# Altium PCB Capstone.PcbDoc
Units mil, origin at the board's own origin, x right, y up, seen from the top; angles counter-clockwise.
Board outline 6000 x 4000 mil, 2 copper layers (Top Layer, Bottom Layer), stack 61.756 mil thick; 44 components, 44 nets, 202 pads, 31 vias.
Unrouted connection lines stored in the file: 29.
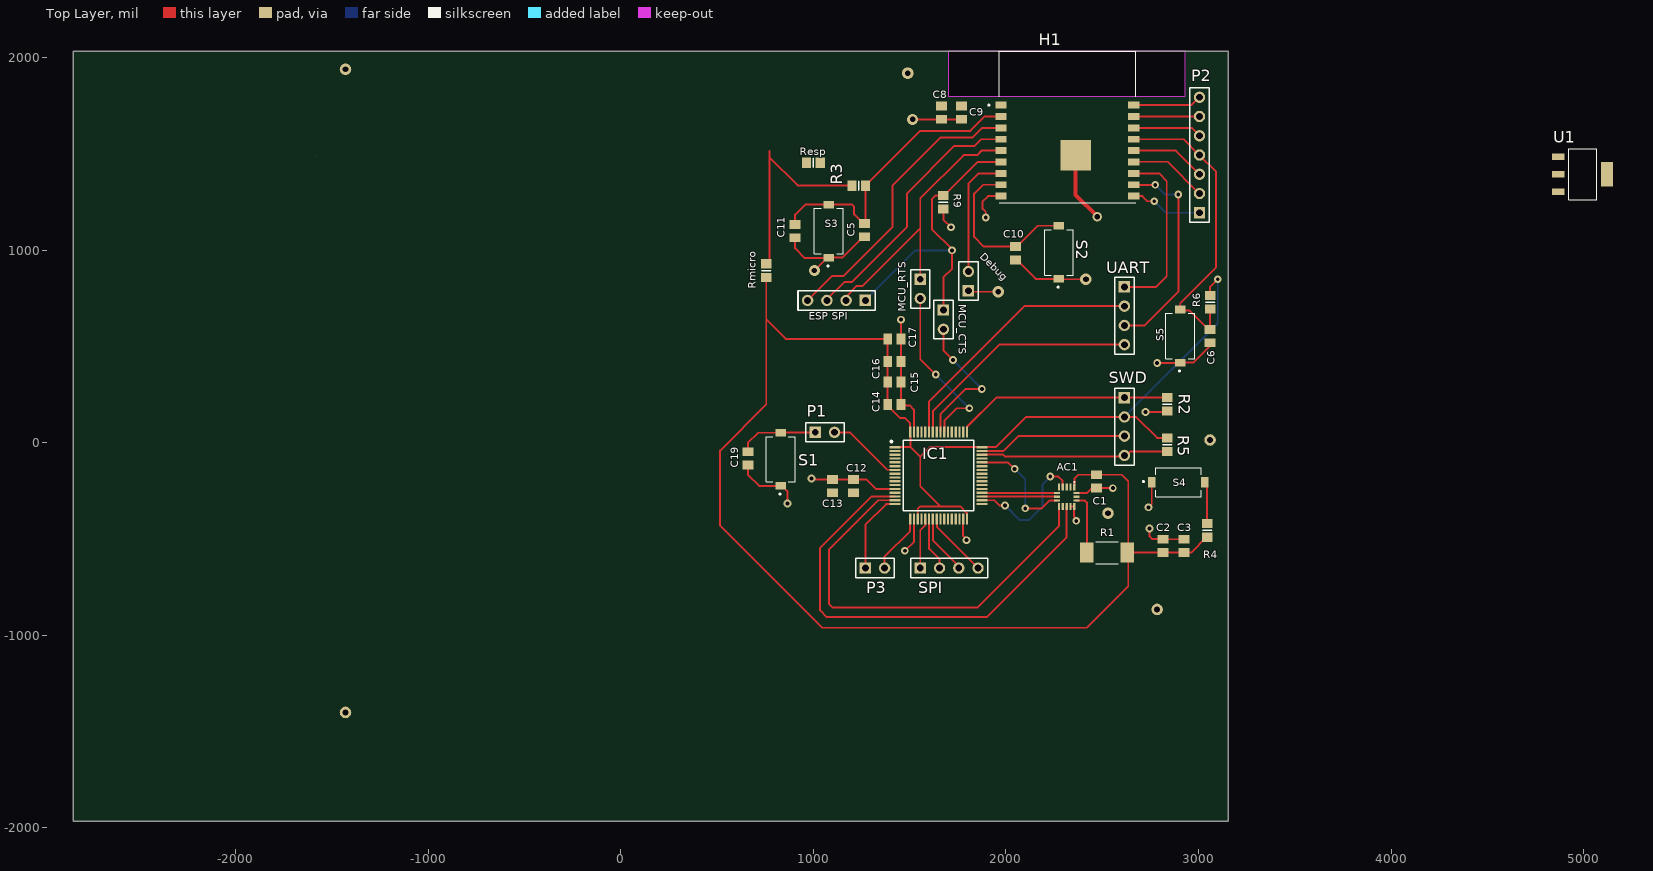
[diagram p0: Top Layer view]
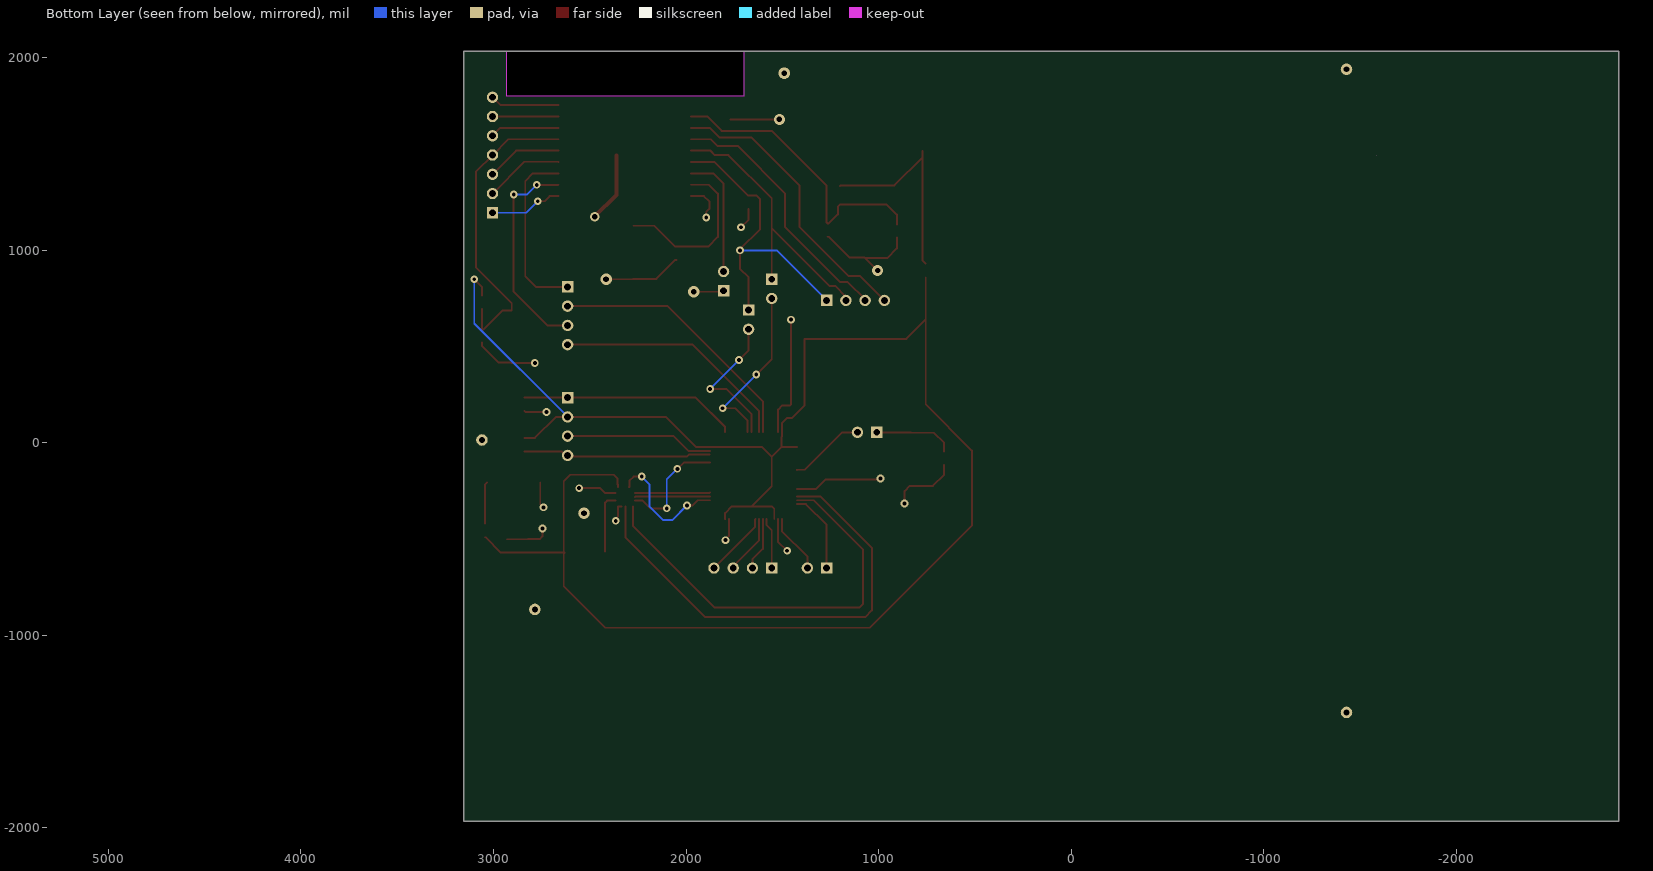
[diagram p1: Bottom Layer view, seen from below]

## Layer stack, top to bottom
Top Solder: solder mask 1, SM-001, Dk 4
Top Layer: signal copper 1.3779
Dielectric 1: core 59, Core-043, Dk 4.3
Bottom Layer: signal copper 1.3779
Bottom Solder: solder mask 1, SM-001, Dk 4

## Board outline
-2845,-1965 3155,-1965 3155,2035 -2845,2035
cut-out: -1585,1490
cut-out: 1700,2035 1700,1800 2930,1800 2930,2035

## Design rules (kind name [scope] priority, off if disabled: settings)
Clearance [All] p1: gap=10 ignorepadtopadclearanceinfootprint=FALSE except(0: Arc-Hole Track-Hole SMDPad-Hole THPad-Hole Via-Hole Fill-Hole Poly-Hole Region-Hole Text-Hole; 6: Arc-Arc Arc-Track Arc-SMDPad Track-Track Track-SMDPad SMDPad-SMDPad)
DiffPairsRouting [All] p1: maxlimit=10 minlimit=6 mostfreqgap=10 toplayer_minwidth=15 toplayer_maxwidth=15 toplayer_prefwidth=15 bottomlayer_minwidth=15 bottomlayer_maxwidth=15 bottomlayer_prefwidth=15 maxuncoupledlength=500
PolygonConnect [All] p1: connectstyle=Direct reliefconductorwidth=10 reliefentries=4 polygonreliefangle="90 Angle" airgapwidth=10
RoomDefinition Capstone [InComponentClass('Capstone')] p1: confinementstyle=ConfineOut formatcopy=TRUE lockcomponents=FALSE outline 3200,-1905 3560,-1905 3560,-1425 3200,-1425
RoutingVias [All] p1: holewidth=28 width=50 viastyle="Through Hole" minholewidth=28 minwidth=50 maxholewidth=28 maxwidth=50
SolderMaskExpansion [All] p1: expansion=4
Width [All] p1: maxlimit=20 minlimit=10 preferedwidth=10 minimp=50.000000 maximp=50.000000 favimp=50.000000
29 further rules are at their usual default settings.

## Components (designator, comment, footprint, x,y, rotation, side; value= is the part's Value field where it differs from the comment)
AC1 "ADXL362BCCZ-RL7" CC-16-4 2315,-280 r270 top
C1 "Cap" *CAPC2012X88N 2470,-200 r270 top value=1uF
C2 "Cap" *CAPC2012X88N 2815,-535 r270 top value=0.1uF
C3 "Cap" *CAPC2012X88N 2925,-535 r90 top value=1uF
C5 "Cap" *CAPC2012X88N 1265,1105 r270 top value=0.1uF
C6 "Cap" *CAPC2012X88N 3060,555 r270 top value=0.1uF
C8 "Cap" *CAPC2012X88N 1665,1715 r270 top value=10uF
C9 "Cap" *CAPC2012X88N 1770,1715 r270 top value=0.1uF
C10 "Cap" *CAPC2012X88N 2050,985 r90 top value=0.1uF
C11 "Cap" *CAPC2012X88N 905,1100 r90 top value=0.1uF
C12 "Cap" *CAPC2012X88N 1209,-224.45 r270 top value=10nF
C13 "Cap" *CAPC2012X88N 1099,-224.45 r270 top value=1uF
C14 "Cap" *CAPC2012X88N 1420,200 r180 top value=4.7uF
C15 "Cap" *CAPC2012X88N 1420,316.67 r180 top value=100nF
C16 "Cap" *CAPC2012X88N 1420,423.33 r180 top value=100nF
C17 "Cap" *CAPC2012X88N 1420,540 r180 top value=100nF
C19 "Cap" *CAPC2012X88N 660,-80 r90 top value=0.1uF
Debug "Header 2" HDR1X2 1805,790 r90 top
"ESP SPI" "Header 4" HDR1X4 1270,740 r180 top
H1 "ESP-WROOM-02D" ESPWROOM02D 2290,1640 r0 top
IC1 "STM32L433RCT6" QFP50P1200X1200X160-64N 1650,-170 r0 top
MCU_CTS "Header 2" HDR1X2 1675,690 r270 top (schematic designator P4)
MCU_RTS "Header 2" HDR1X2 1555,850 r270 top (schematic designator P5)
P1 "Reset" HDR1X2 1010,55 r0 top
P2 "Comment" HDR1X7 3005,1195 r90 top
P3 "Debug" HDR1X2 1270,-650 r0 top
R1 "Res1" RES_WSC_2515 2525,-570 r0 top value=50
R2 "Res1" 6-0805_N 2838.05,200 r270 top value=1K
R3 "Res1" 6-0805_N 1235,1335 r0 top value=10K
R4 "Res1" 6-0805_N 3045,-454.57 r270 top value=10K
R5 "Res1" 6-0805_N 2838.06,-10 r90 top value=1K
R6 "Res1" 6-0805_N 3060,730 r270 top value=10K
R9 "Res1" 6-0805_N 1675,1250 r90 top value=10K
Resp "Comment" 6-0805_N 1000,1455 r180 top value=0
Rmicro "Comment" 6-0805_N 755,895 r270 top value=0
S1 "KSR222GLFS" *SW_KSR223GLFG 830,-85 r90 top
S2 "KSR222GLFS" *SW_KSR223GLFG 2275,990 r90 top
S3 "KSR222GLFS" *SW_KSR223GLFG 1080,1100 r90 top
S4 "KSR222GLFS" *SW_KSR223GLFG 2895,-205 r0 top
S5 "KSR222GLFS" *SW_KSR223GLFG 2905,555 r90 top
SPI "" HDR1X4 1555,-650 r0 top
SWD "Comment" HDR1X4 2615,235 r270 top
U1 "LM1117IMPX-3.3" *SOT230P700X180-4N 4995,1395 r0 top
UART "Comment" HDR1X4 2615,810 r270 top

## Footprints (in the part's own frame and the unit in brackets; to place one, negate y for a bottom-side part, rotate by r counter-clockwise, add the part's x,y. Pads: shape width x height; smd on the part's side, far side on the other; paste and mask are expansions set on the pad)
6-0805_N [mm] "Chip Resistor, Body 2.0x1.2mm, IPC Medium Density"
  rect 1.2x1.4 smd: 1(-0.9,0) 2(0.9,0)
  silkscreen extent 0,-0.6 0,0.6, body extent -1.07,-0.7 1.07,0.7, height 0.7
*CAPC2012X88N [mm]
  rect 1.16x1.47 smd: 1(-0.875,0) 2(0.875,0)
*SOT230P700X180-4N [mil]
  rect 64x35 smd: 1(-126,91) 2(-126,0) 3(-126,-91)
  rect 64x125 smd: 4(126,0)
  silkscreen extent -73,-132 73,132
*SW_KSR223GLFG [mm]
  rect 1x1.4 smd: 1(-3.5,0) 2(3.5,0)
  silkscreen extent -4.7,-1.9 3,1.9
CC-16-4 [mm]
  rect 0.925x0.3 smd: 1(-1.288,1) 2(-1.288,0.5) 3(-1.288,0) 4(-1.288,-0.5) 5(-1.288,-1) 9(1.287,-1) 10(1.287,-0.5) 11(1.287,0) 12(1.287,0.5) 13(1.287,1)
  rect 0.3x0.8 smd: 6(-0.5,-1.275) 7(0,-1.275) 8(0.5,-1.275) 14(0.5,1.275) 15(0,1.275) 16(-0.5,1.275)
  silkscreen extent -1.98,1 -1.93,1.04
ESPWROOM02D [mm]
  rect 1.5x0.9 smd: 1(-8.025,2.9) 2(-8.025,1.4) 3(-8.025,-0.1) 4(-8.025,-1.6) 5(-8.025,-3.1) 6(-8.025,-4.6) 7(-8.025,-6.1) 8(-8.025,-7.6) 9(-8.025,-9.1) 10(9.475,-9.1) 11(9.475,-7.6) 12(9.475,-6.1) 13(9.475,-4.6) 14(9.475,-3.1) 15(9.475,-1.6) 16(9.475,-0.1) 17(9.475,1.4) 18(9.475,2.9)
  rect 4x4 smd: 19(1.825,-3.71)
  silkscreen extent -9.72,-10 9.72,10
HDR1X2 [mm] "Connector; Header; 2 Position"
  rect 1.5x1.5 hole 0.9: 1(0,0)
  round 1.5 hole 0.9: 2(2.54,0)
  silkscreen extent -1.27,-1.27 3.81,1.27
HDR1X4 [mm] "Connector; Header; 4 Position"
  rect 1.5x1.5 hole 0.9: 1(0,0)
  round 1.5 hole 0.9: 2(2.54,0) 3(5.08,0) 4(7.62,0)
  silkscreen extent -1.27,-1.27 8.89,1.27
HDR1X7 [mm] "Connector; Header; 7 Position"
  rect 1.5x1.5 hole 0.9: 1(0,0)
  round 1.5 hole 0.9: 2(2.54,0) 3(5.08,0) 4(7.62,0) 5(10.16,0) 6(12.7,0) 7(15.24,0)
  silkscreen extent -1.27,-1.27 16.51,1.27
QFP50P1200X1200X160-64N [mm]
  rect 1.475x0.3 smd: 1(-5.738,3.75) 2(-5.738,3.25) 3(-5.738,2.75) 4(-5.738,2.25) 5(-5.738,1.75) 6(-5.738,1.25) 7(-5.738,0.75) 8(-5.738,0.25) 9(-5.738,-0.25) 10(-5.738,-0.75) 11(-5.738,-1.25) 12(-5.738,-1.75) 13(-5.738,-2.25) 14(-5.738,-2.75) 15(-5.738,-3.25) 16(-5.738,-3.75) 33(5.738,-3.75) 34(5.738,-3.25) 35(5.738,-2.75) 36(5.738,-2.25) 37(5.738,-1.75) 38(5.738,-1.25) 39(5.738,-0.75) 40(5.738,-0.25) 41(5.738,0.25) 42(5.738,0.75) 43(5.738,1.25) 44(5.738,1.75) 45(5.738,2.25) 46(5.738,2.75) 47(5.738,3.25) 48(5.738,3.75)
  rect 0.3x1.475 smd: 17(-3.75,-5.738) 18(-3.25,-5.738) 19(-2.75,-5.738) 20(-2.25,-5.738) 21(-1.75,-5.738) 22(-1.25,-5.738) 23(-0.75,-5.738) 24(-0.25,-5.738) 25(0.25,-5.738) 26(0.75,-5.738) 27(1.25,-5.738) 28(1.75,-5.738) 29(2.25,-5.738) 30(2.75,-5.738) 31(3.25,-5.738) 32(3.75,-5.738) 49(3.75,5.738) 50(3.25,5.738) 51(2.75,5.738) 52(2.25,5.738) 53(1.75,5.738) 54(1.25,5.738) 55(0.75,5.738) 56(0.25,5.738) 57(-0.25,5.738) 58(-0.75,5.738) 59(-1.25,5.738) 60(-1.75,5.738) 61(-2.25,5.738) 62(-2.75,5.738) 63(-3.25,5.738) 64(-3.75,5.738)
  silkscreen extent -6.35,-4.65 4.65,4.65, body extent -6,-6 6,6, height 1.6
RES_WSC_2515 [mil]
  rect 69x103 smd paste+0 mask+0: 1(-105.5,0) 2(105.5,0)
  silkscreen extent -59,-56 59,56, body extent 0,0 10,10, height 10

## Part data
AC1: "Accelerometer", Manufacturer_Name="Analog Devices", Mouser Part Number=584-ADXL362BCCZ-R7, Datasheet Link=http://www.analog.com/media/en/technical-documentation/data-sheets/ADXL362.pdf, Manufacturer_Part_Number=ADXL362BCCZ-RL7, Mouser Price/Stock=https://www.mouser.com/Search/Refine.aspx?Keyword=584-ADXL362BCCZ-R7
C1 C2 C3 C5 C6 C8 C9 C10 C11 C12 C13 C14 C15 C16 C17 C19: "Capacitor", LatestRevisionDate=17-Jul-2002, LatestRevisionNote="Re-released for DXP Platform.", PackageDescription="Radial Cap, Thru-Hole; 2 Leads; 0.3 in Pin Spacing", PackageReference=RAD-0.3, Published=8-Jun-2000, Publisher="Altium Limited"
Debug MCU_CTS MCU_RTS: "Header, 2-Pin", LatestRevisionDate=17-Jul-2002, LatestRevisionNote="Re-released for DXP Platform.", Publisher="Altium Limited"
"ESP SPI": "Header, 4-Pin", LatestRevisionDate=17-Jul-2002, LatestRevisionNote="Re-released for DXP Platform.", Publisher="Altium Limited"
H1: "Hardware", Manufacturer_Name=Espressif, Mouser Part Number=356-ESPWROOM-02D, Datasheet Link=https://br.mouser.com/datasheet/2/891/esp-wroom-02d_esp-wroom-02u_datasheet_en-1365835.pdf, Height=3.2mm, Manufacturer_Part_Number=ESP-WROOM-02D
IC1: "Integrated Circuit", Manufacturer_Name=STMicroelectronics, Mouser Part Number=511-STM32L433RCT6, Datasheet Link=https://www.st.com/resource/en/datasheet/stm32l433rc.pdf, Height=1.6mm, Manufacturer_Part_Number=STM32L433RCT6, Mouser Price/Stock=https://www.mouser.com/Search/Refine.aspx?Keyword=511-STM32L433RCT6
P1 P3: library part "Header 2", "Header, 2-Pin", LatestRevisionDate=17-Jul-2002, LatestRevisionNote="Re-released for DXP Platform.", Publisher="Altium Limited"
P2: library part "Header 7", "Header, 7-Pin", LatestRevisionDate=17-Jul-2002, LatestRevisionNote="Re-released for DXP Platform.", Publisher="Altium Limited"
R1 R2 R3 R4 R5 R6 R9: "Resistor", LatestRevisionDate=17-Jul-2002, LatestRevisionNote="Re-released for DXP Platform.", PackageDescription="Axial Device, Thru-Hole; 2 Leads; 0.3 in Pin Spacing", PackageReference=AXIAL-0.3, Published=8-Jun-2000, Publisher="Altium Limited"
Resp Rmicro: library part Res1, "Resistor", LatestRevisionDate=17-Jul-2002, LatestRevisionNote="Re-released for DXP Platform.", PackageDescription="Axial Device, Thru-Hole; 2 Leads; 0.3 in Pin Spacing", PackageReference=AXIAL-0.3, Published=8-Jun-2000, Publisher="Altium Limited"
S1 S2 S3 S4 S5: library part KSR223GLFG, "Switch Tactile N.O. SPST Round Button Gull Wing 0.01A 32VDC 0.2VA 200000Cycles 2N SMD Automotive T/R", Package=None, Digi-Key_Part_Number=401-1704-1-ND, Digi-Key_Purchase_URL=https://www.digikey.com/product-detail/en/c-k/KSR223GLFG/401-1704-1-ND/958078?utm_source=snapeda&utm_medium=aggregator&utm_campaign=symbol, MF=C&K, MP=KSR223GLFG, SnapEDA_Link=https://www.snapeda.com/parts/KSR223GLFG/C%26K/view-part/?ref=snap
SPI SWD UART: library part "Header 4", "Header, 4-Pin", LatestRevisionDate=17-Jul-2002, LatestRevisionNote="Re-released for DXP Platform.", Publisher="Altium Limited"
U1: library part LM1117MPX-3.3, "Linear Regulator, Fix, 3.3v, 800ma, Sot-223-4, Full Reel", Package="SOT-223-4 Texas Instruments", Digi-Key_Part_Number=LM1117MPX-3.3/NOPBCT-ND, Digi-Key_Purchase_URL=https://www.digikey.com/product-detail/en/texas-instruments/LM1117MPX-3.3-NOPB/LM1117MPX-3.3-NOPBCT-ND/1010516?utm_source=snapeda&utm_medium=aggregator&utm_campaign=symbol, MF="Texas Instruments", MP=LM1117MPX-3.3/NOPB, SnapEDA_Link=https://www.snapeda.com/parts/LM1117MPX-3.3/NOPB/Texas%20Instruments/view-part/?ref=snap

## Free pads (board coordinates)
  round 60 hole 30 unplated: 1(-1430,1940) 3(1490,1920) 4(3060,15) 5(2785,-865) 6(2530,-365)
  round 60 hole 30: 2(-1430,-1400)

## Via types
v1: diameter 40, hole 20, Top Layer to Bottom Layer, 26 vias
v2: diameter 56, hole 28, Top Layer to Bottom Layer, 2 vias
v3: diameter 60, hole 30, Top Layer to Bottom Layer, 2 vias
v4: diameter 50, hole 28, Top Layer to Bottom Layer, 1 vias

## Nets (pads, with @x,y where several pads share a name; then routed paths per layer and width w, separated by ;. In a path a pad name is that pad's centre, name@x,y a point inside that pad or via, vN(x,y) a via of type N, cw(c..) or ccw(c..) an arc to the next point about the centre after c; other vN are vias at no path point)
ADXL362_CS: AC1.8 IC1.44 | length 592.4
  Top Layer w10: IC1.44 1876.81,-102.01 2012.01,-102.01 v1(2045,-135) ; v1(2100,-340) 2184.87,-340 2225.19,-299.68 AC1.8
  Bottom Layer w10: v1(2045,-135) 2100,-190 v1(2100,-340)
ADXL362_INT1: AC1.11 IC1.14 | length 2450.3
  Top Layer w10: IC1.14 1301.73,-278.27 1035,-545 1035,-870 1070,-905 1900,-905 2315,-490 AC1.11
ADXL362_INT2: AC1.9 IC1.15 | length 2209.5
  Top Layer w10: IC1.15 1337.05,-297.95 1080,-555 1080,-835 1100,-855 1850,-855 2275.63,-429.37 AC1.9
ADXL362_MISO: AC1.7 IC1.35 | length 389.6
  Top Layer w10: IC1.35 1876.77,-279.13 2263.94,-279.13 AC1.7
ADXL362_MOSI: AC1.6 IC1.36 | length 389.6
  Top Layer w10: IC1.36 1876.77,-259.45 2263.94,-259.45 AC1.6
ADXL362_SCK: AC1.4 IC1.34 | length 663
  Top Layer w10: IC1.34 1937.95,-297.95 1965,-325 v1(1995,-325) ; v1(2230,-175) 2272.19,-175 2294.41,-197.22 2294.41,-228.4 AC1.4
  Bottom Layer w10: v1(1995,-325) 2070,-400 2120,-400 2190,-330 2190,-215 v1(2230,-175)
EN: C5.1 C11.2 H1.2 R3.2 S3.2 | length 1547.7
  Top Layer w10: C11.2 905,1185 957.8,1237.8 S3.2 1200.55,1237.8 1211.67,1226.67 1211.67,1186.67 1258.9,1139.45 C5.1 1270.43,1144.88 R3.2 1270.43,1335.94 1554.49,1620 1815,1620 1890.12,1695.12 H1.2
GND: AC1.12 AC1.13 AC1.16 C1.2 C2.1 C3.2 C5.2 C6.2 C8.2 C9.2 C10.1 C11.1 C12.1 C13.1 C14.1 C15.1 C16.1 C17.1 C19.1 Debug.1 H1.9 H1.13 H1.18 H1.19 IC1.12 IC1.18 IC1.31 IC1.47 IC1.63 P2.2 P2.7 R2.2 R9.1 S1.1 S2.1 S3.1 S4.1 S5.1 SWD.3 U1.1 | length 6481.1
  Top Layer w10: C19.1 660,-165 717.8,-222.8 S1.1 837.87,-222.8 865,-249.92 v1(865,-315) ; C11.1 905,1010 955,960 S3.1@1069.92,960 ; v1(990,-185) 995,-190 C13.1 C12.1 1275,-190 1323.9,-238.9 IC1.12 ; v2(1005,895) 1005,895.08 S3.1@1069.92,960 ; C5.2 1258.9,1070.55 1150.55,962.2 S3.1 1072.13,962.2 S3.1@1069.92,960 ; v1(1455,640) 1455,540.55 C17.1 C16.1 C15.1 C14.1 1459.45,195 1500,195 1522.05,172.95 IC1.63 ; v1(1475,-560) 1522.79,-512.21 1522.79,-396.64 IC1.18 ; v2(1515,1680) 1664.45,1680 C8.2 C9.2 ; R9.1 1675,1160 v1(1715,1120) ; IC1.31 1777.95,-483.08 1795,-500.13 v1(1795,-505) ; Debug.1 1810,785 v3(1960,785) ; IC1.47 1987.95,-42.05 2065,35 SWD.3 ; v1(1895,1170) 1895,1199.14 1879.14,1215 1879.14,1254.14 1906.73,1281.73 H1.9 ; C10.1 2056.1,950.55 2154.45,852.2 S2.1 2277.2,850 v3(2415,850) ; AC1.12 AC1.13 2354.37,-383.55 2365,-394.18 v1(2365,-405) ; AC1.16 2420,-260.31 2445.87,-234.45 C1.2 2470.69,-235.14 v1(2555.14,-235.14) ; H1.13 2664.13,1460 2840,1460 P2.2 ; H1.18 2663.86,1755 2965,1755 P2.7 ; v1(2725,160) 2833.49,160 R2.2 ; v1(2740,-335) 2757.2,-317.8 S4.1 ; v1(2745,-445) 2745.61,-445.61 2745.61,-485.61 2760,-500 C2.1@2810,-500 ; v1(2785,415) 2907.2,415 S5.1 2971.81,417.2 3060,505.39 C6.2 ; C2.1@2820,-500 C2.1@2810,-500 ; C3.2@2930,-500.55 C3.2 C2.1 2810.55,-500.55 C2.1@2810,-500
  Top Layer w20: H1.19 2361.85,1288.15 v4(2475,1175)
IO0: C10.2 H1.8 S2.2 | length 886
  Top Layer w10: H1.8 1880.79,1340.79 1835,1295 1835,1070 1885.55,1019.45 C10.2 2056.1,1019.45 2164.45,1127.8 S2.2@2272.2,1127.8
IO2: Debug.2 H1.7 | length 646.8
  Top Layer w10: Debug.2 1805,1345 1859.84,1399.84 H1.7
IO4: H1.10 P2.1 | length 392
  Top Layer w10: H1.10 2708.27,1281.73 2735,1255 v1(2770,1255)
  Bottom Layer w10: v1(2770,1255) 2830,1195 P2.1 P2.1@2995,1185
IO5: H1.14 P2.3 | length 392.9
  Top Layer w10: H1.14 2882.05,1517.95 P2.3
IO12: "ESP SPI.3" H1.4 | length 1356.2
  Top Layer w10: 1070,740 1070,745 1160,835 1200,835 1485,1120 1485,1295 1732.5,1542.5 1837.5,1542.5 1872.01,1577.01 H1.4
IO13: "ESP SPI.2" H1.5 MCU_RTS.1 | length 1493.8
  Top Layer w10: 1170,740 1170,760 1225,815 1255,815 1555,1115 ; MCU_RTS.1 1555,1115 ; H1.5 1872.95,1517.95 1850,1495 1780,1495 1555,1270 1555,1115
IO14: "ESP SPI.4" H1.3 | length 1501.2
  Top Layer w10: 970,740 1097.5,867.5 1157.5,867.5 1410,1120 1410,1335 1660,1585 1825,1585 1876.06,1636.06 H1.3
IO15: "ESP SPI.1" H1.6 MCU_CTS.1 R9.2 | length 1629.7
  Top Layer w10: MCU_CTS.1 1675,860 1720,905 v1(1720,1000) ; v1@1720,1005 1615,1110 1615,1265.87 1634.57,1285.43 R9.2 1678.94,1285.43 1852.4,1458.9 H1.6
  Bottom Layer w10: 1270,740 1530,1000 v1(1720,1000)
IO16: H1.17 P2.6 | length 342
  Top Layer w10: H1.17 2663.15,1695 P2.6
NetAC1_14: AC1.14 R1.1 | length 313.6
  Top Layer w10: AC1.14 2409.68,-299.68 2420,-310 R1.1@2420,-564.5
NetBT1_1: 
NetBT1_2: 
NetBT2_1: U1.3
NetBT2_2: 
NetC19_2: C19.2 P1.1 S1.2 | length 418.3
  Top Layer w10: C19.2 660,0 712.8,52.8 S1.2 832.2,55 P1.1
NetH1_11: H1.11 UART.3 | length 1110.5
  Top Layer w10: UART.3 2720,610 2895,785 v1(2895,1290) ; H1.11 2663.82,1340 v1(2775,1340)
  Bottom Layer w10: v1(2775,1340) 2825,1290 v1(2895,1290)
NetH1_12: H1.12 UART.1 | length 926.3
  Top Layer w10: UART.1 2780,810 2835,865 2835,1360 2795.16,1399.84 H1.12
NetIC1_7: IC1.7 P1.2 | length 395.1
  Top Layer w10: P1.2 1190,55 1384.57,-139.57 1423.19,-139.57 IC1.7
NetIC1_16: IC1.16 P3.1 | length 423.6
  Top Layer w10: P3.1 1270,-425 1377.36,-317.64 IC1.16
NetIC1_17: IC1.17 P3.2 | length 308.9
  Top Layer w10: P3.2 1370,-590 1502.36,-457.64 IC1.17
NetR4_1: R4.1 S4.2 | length 219.2
  Top Layer w10: S4.2 3045,-217.2 R4.1
RST: C6.1 H1.15 P2.4 R6.2 S5.2 | length 1590.4
  Top Layer w10: H1.15 2922.99,1577.01 P2.4 3090,1410 3090,910 2905,725 S5.2 ; S5.2@2905,686.69 2953.31,686.69 3050.55,589.45 C6.1 3060,605 R6.2
SPI1_CS: IC1.24 SPI.4 | length 343.1
  Top Layer w10: IC1.24 1641.06,-396.81 1641.06,-436.06 SPI.4
SPI1_MISO: IC1.22 SPI.2 | length 276.5
  Top Layer w10: IC1.22 1600.79,-550.79 1655,-605 SPI.2
SPI1_MOSI: IC1.23 SPI.3 | length 309.8
  Top Layer w10: IC1.23 1620.47,-505.47 1755,-640 SPI.3
SPI1_SCK: IC1.21 SPI.1 | length 264.9
  Top Layer w10: SPI.1 1555,-452.82 1581.1,-426.72 IC1.21
STLINK_SWCLK: IC1.49 R2.1 SWD.1 | length 1130.4
  Top Layer w10: IC1.49 1797.64,79.04 1797.64,82.64 1950,235 SWD.1 2615.43,235.43 R2.1
STLINK_SWDIO: IC1.46 R5.1 SWD.4 | length 974.3
  Top Layer w10: IC1.46@1876.81,-60.83 1985,-60.83 1994.17,-70 2615,-70 2617,-69 2625,-65 2644.57,-45.43 R5.1
Tout: H1.16 P2.5 | length 359
  Top Layer w10: H1.16 2963.94,1636.06 P2.5
USART1_CTS: IC1.56 MCU_CTS.2 | length 755.8
  Top Layer w10: IC1.56 1659.84,149.84 1790,280 v1(1875,280) ; MCU_CTS.2 1675,480 v1(1725,430)
  Bottom Layer w10: v1(1725,430) v1(1875,280)
USART1_RTS: IC1.55 MCU_RTS.2 | length 891.8
  Top Layer w10: MCU_RTS.2 1555,435 v1(1635,355) ; IC1.55 1680.43,56.81 1680.43,115.43 1745,180 v1(1810,180)
  Bottom Layer w10: v1(1635,355) v1(1810,180)
USART1_RX: IC1.59 UART.2 | length 1378.3
  Top Layer w10: IC1.59 1600.79,214.98 2095.81,710 UART.2
USART1_TX: IC1.58 UART.4 | length 1246.8
  Top Layer w10: IC1.58 1620.47,165.47 1965,510 UART.4
VDD33: IC1.13 R3.1 Resp.2 Rmicro.1 U1.4 | length 1081.7
  Top Layer w10: Rmicro.1 771,946.43 771,1484.5 ; 771,1515 771,1484.5 ; R3.1 1197.07,1337.5 918,1337.5 771,1484.5
VDD_ESP: C8.1 C9.1 H1.1 Resp.1
VDD_MCU: AC1.1 C1.1 C2.2 C3.1 C12.2 C13.2 C14.2 C15.2 C16.2 C17.2 IC1.1 IC1.19 IC1.32 IC1.48 IC1.64 R1.2 R4.2 R5.2 R6.1 Rmicro.2 SWD.2 | length 9691.5
  Top Layer w10: Rmicro.2 755,641 ; IC1.1 1501.46,-22.36 ; IC1.64@1502.36,32.78 IC1.64 1502.36,102.64 1475,130 1449.45,130 1385.55,193.9 C14.2 C15.2 C16.2 C17.2 856,540 755,641 ; IC1.64@1503.27,31.87 1503.27,-20.55 1555,-72.28 ; IC1.19 1541.73,-343.27 1555,-330 1658.77,-330 ; IC1.32 1796.73,-395 1796.73,-364.19 1762.54,-330 1658.77,-330 ; AC1.1 2354.37,-217.01 2355.28,-216.1 2355.28,-185.28 2375,-165.55 C1.1 2600.55,-165.55 2635,-200 R1.2@2635,-565.5 ; R5.2 2784.57,25.43 2675,135 SWD.2 2105,135 1947.64,-22.36 IC1.48 1604.92,-22.36 1555,-72.28 ; R4.2 3041.06,-490 2961.61,-569.45 C3.1 C2.2 2631.05,-569.45 R1.2 2635,-574.5 2635,-745 2420,-960 1045,-960 515,-430 515,-40 755,200 755,641 ; R6.1 3060,810 v1(3100,850) ; 1555,-72.28 1555,-226.23 1658.77,-330
  Bottom Layer w10: SWD.2 3100,620 v1(3100,850)
pads on no net: AC1.2 AC1.3 AC1.5 AC1.10 AC1.15 IC1.2 IC1.3 IC1.4 IC1.5 IC1.6 IC1.8 IC1.9 IC1.10 IC1.11 IC1.20 IC1.25 IC1.26 IC1.27 IC1.28 IC1.29 IC1.30 IC1.33 IC1.37 IC1.38 IC1.39 IC1.40 IC1.41 IC1.42 IC1.43 IC1.45 IC1.50 IC1.51 IC1.52 IC1.53 IC1.54 IC1.57 IC1.60 IC1.61 IC1.62 U1.2